# Altium PCB reflex_beta.PcbDoc (part 1 of 2)
Units mil, origin at the board's own origin, x right, y up, seen from the top; angles counter-clockwise.
Board outline 1299.21 x 1771.65 mil, 6 copper layers (Top Layer, Power Plane, Routing_1, Routing_2, Ground Plane, Bottom Layer), stack 48.468 mil thick; 106 components, 94 nets, 473 pads, 173 vias.
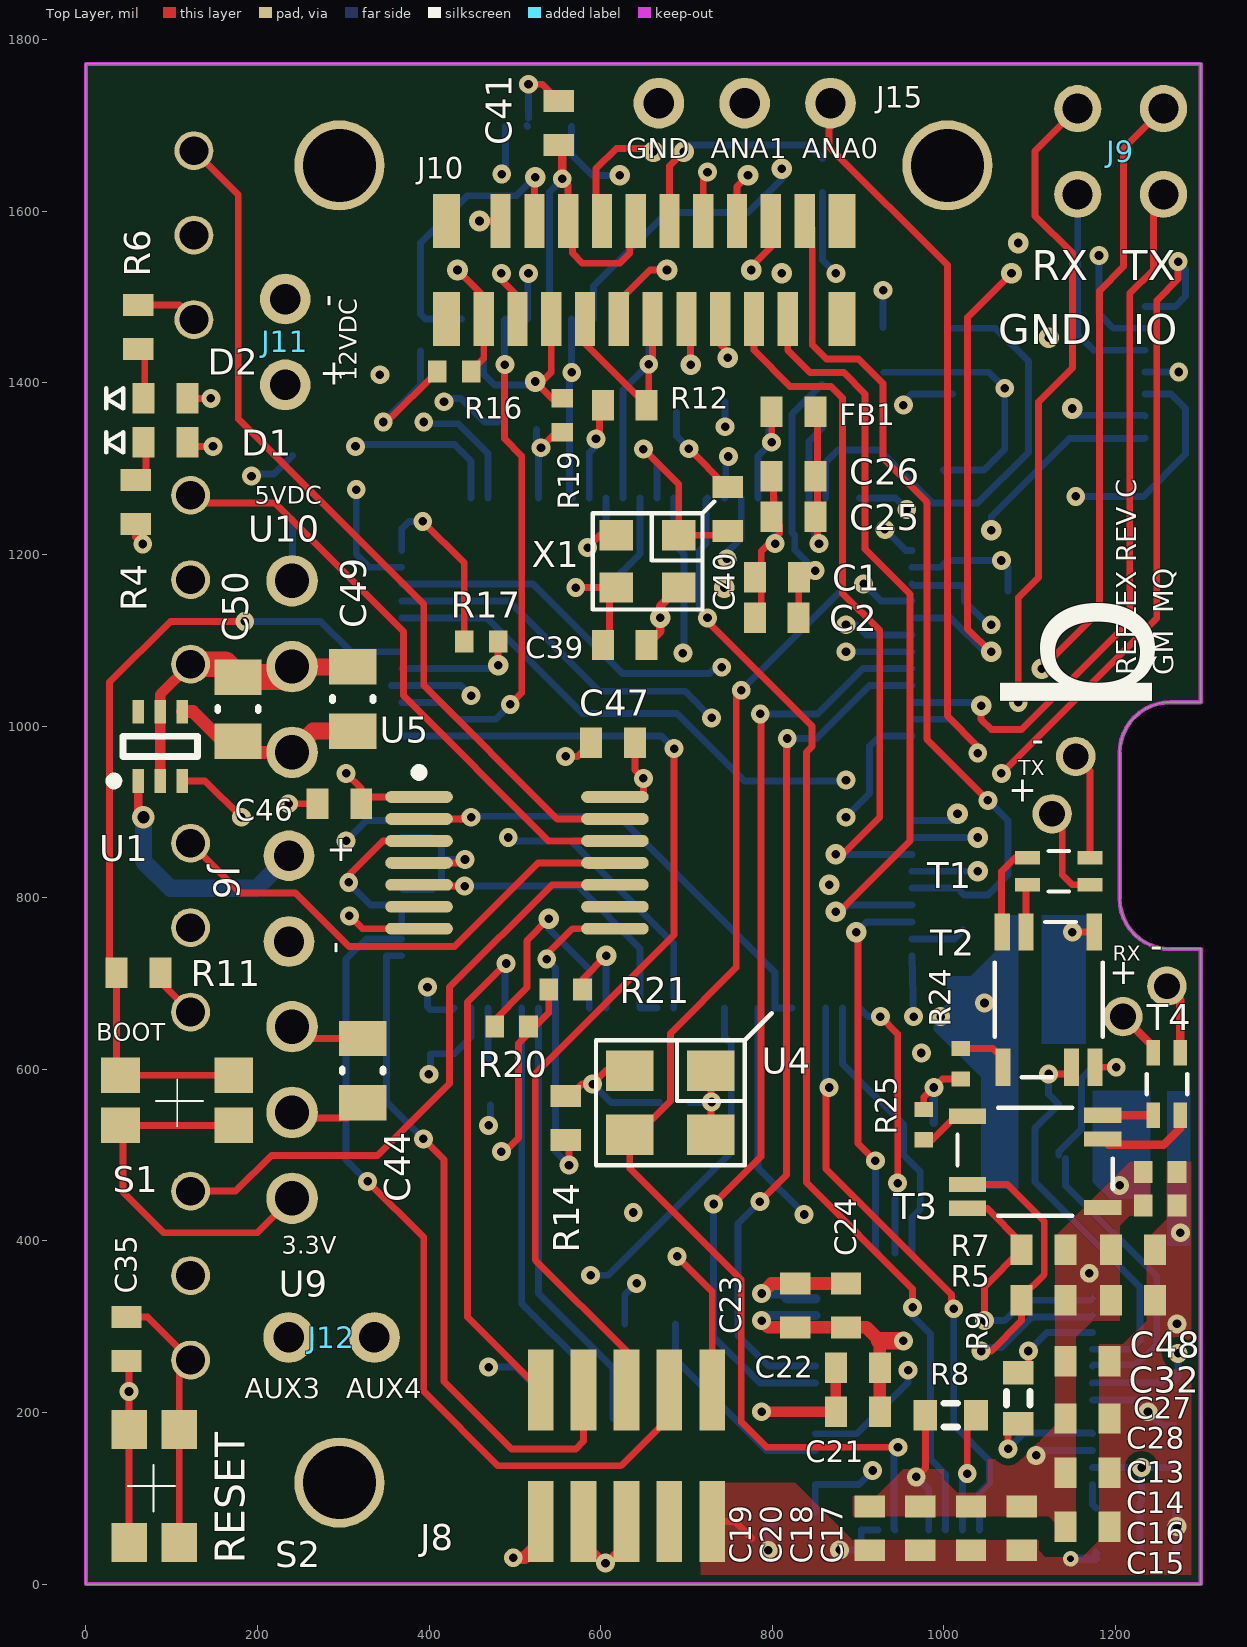
[diagram p0: Top Layer view]
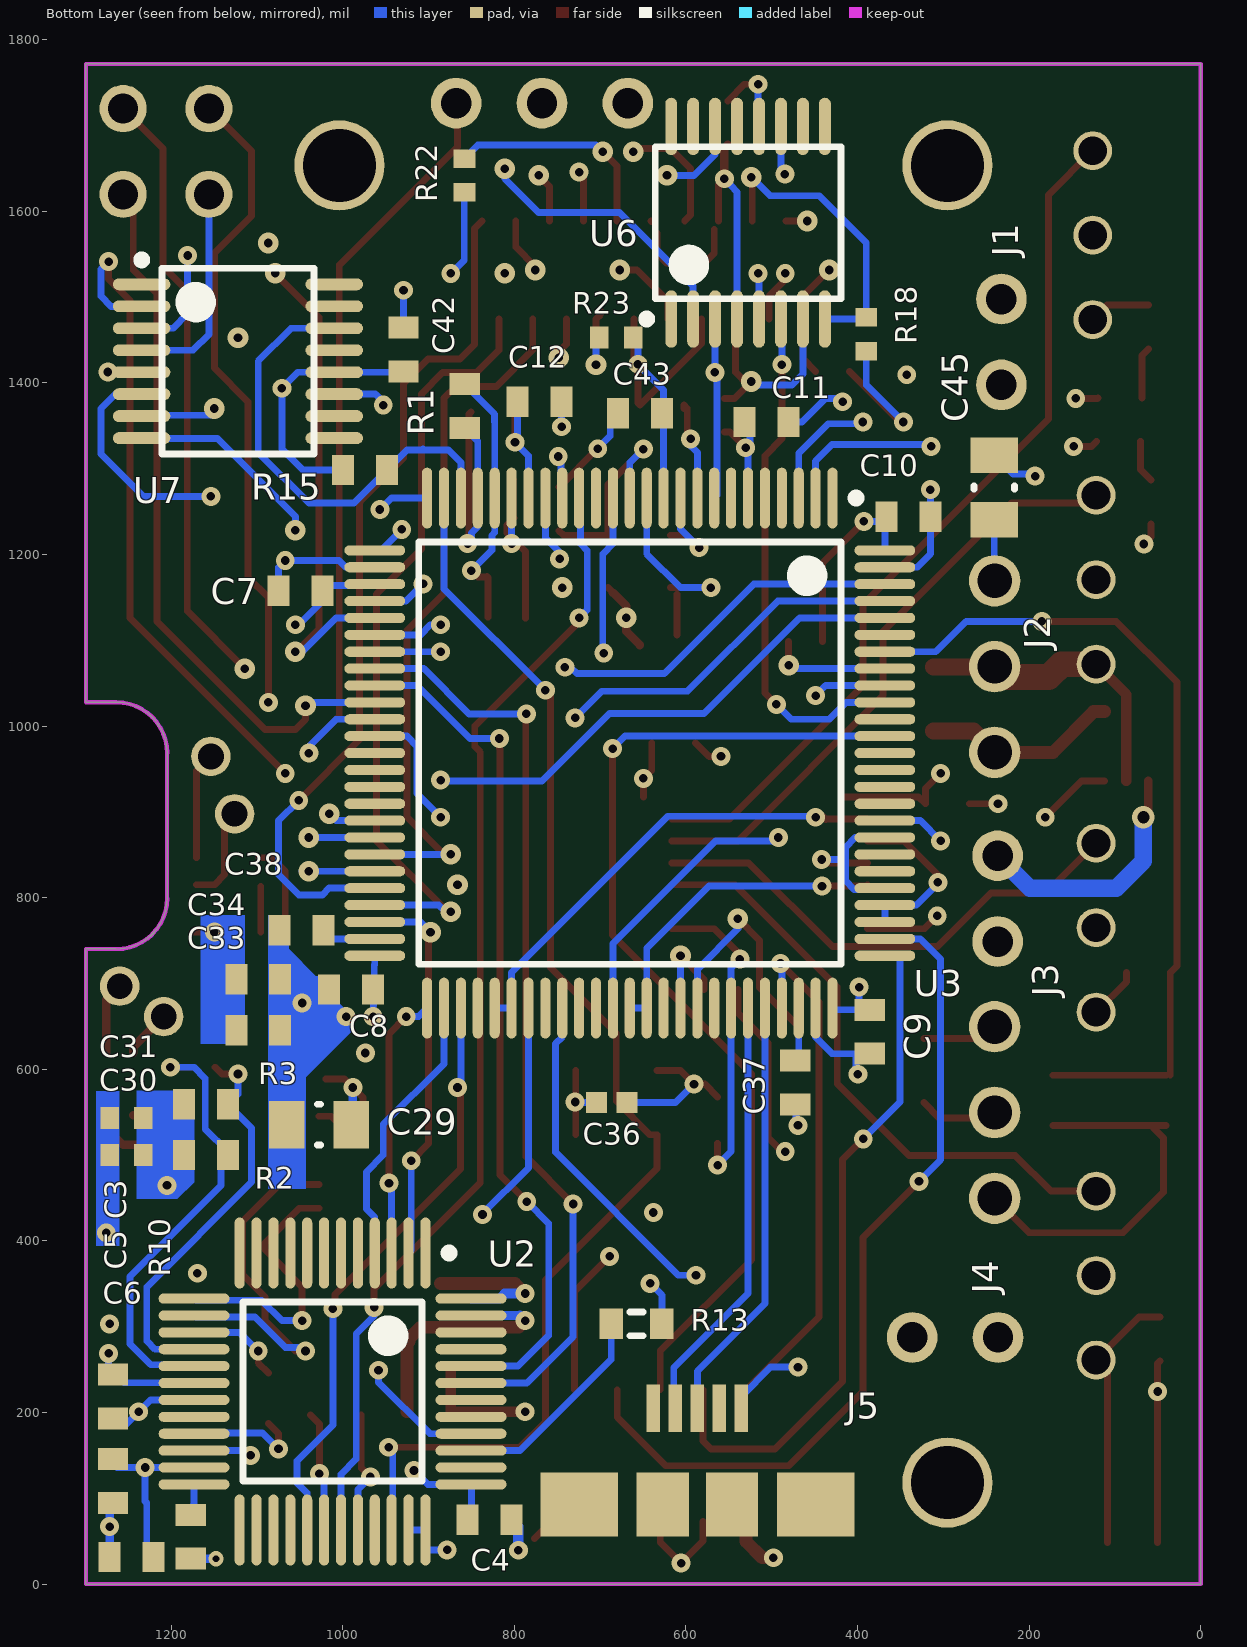
[diagram p1: Bottom Layer view, seen from below]
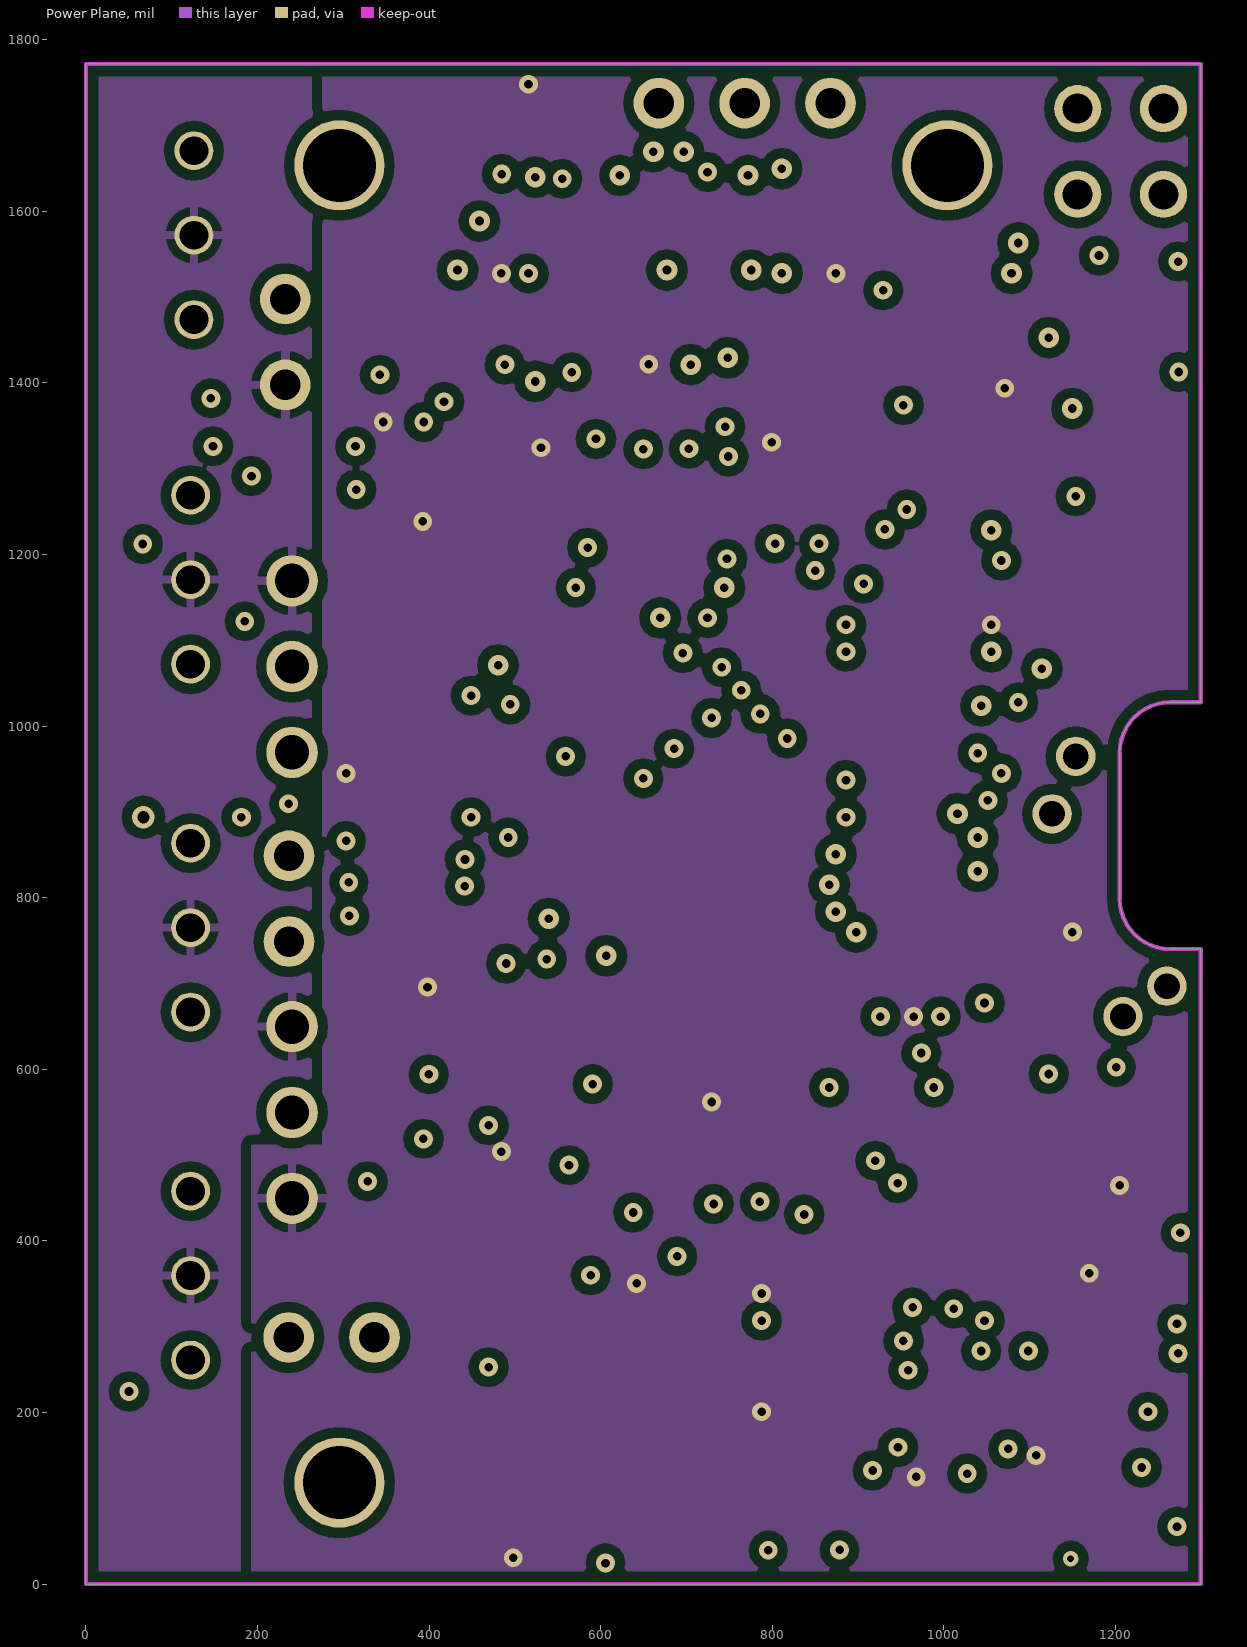
[diagram p2: Power Plane]
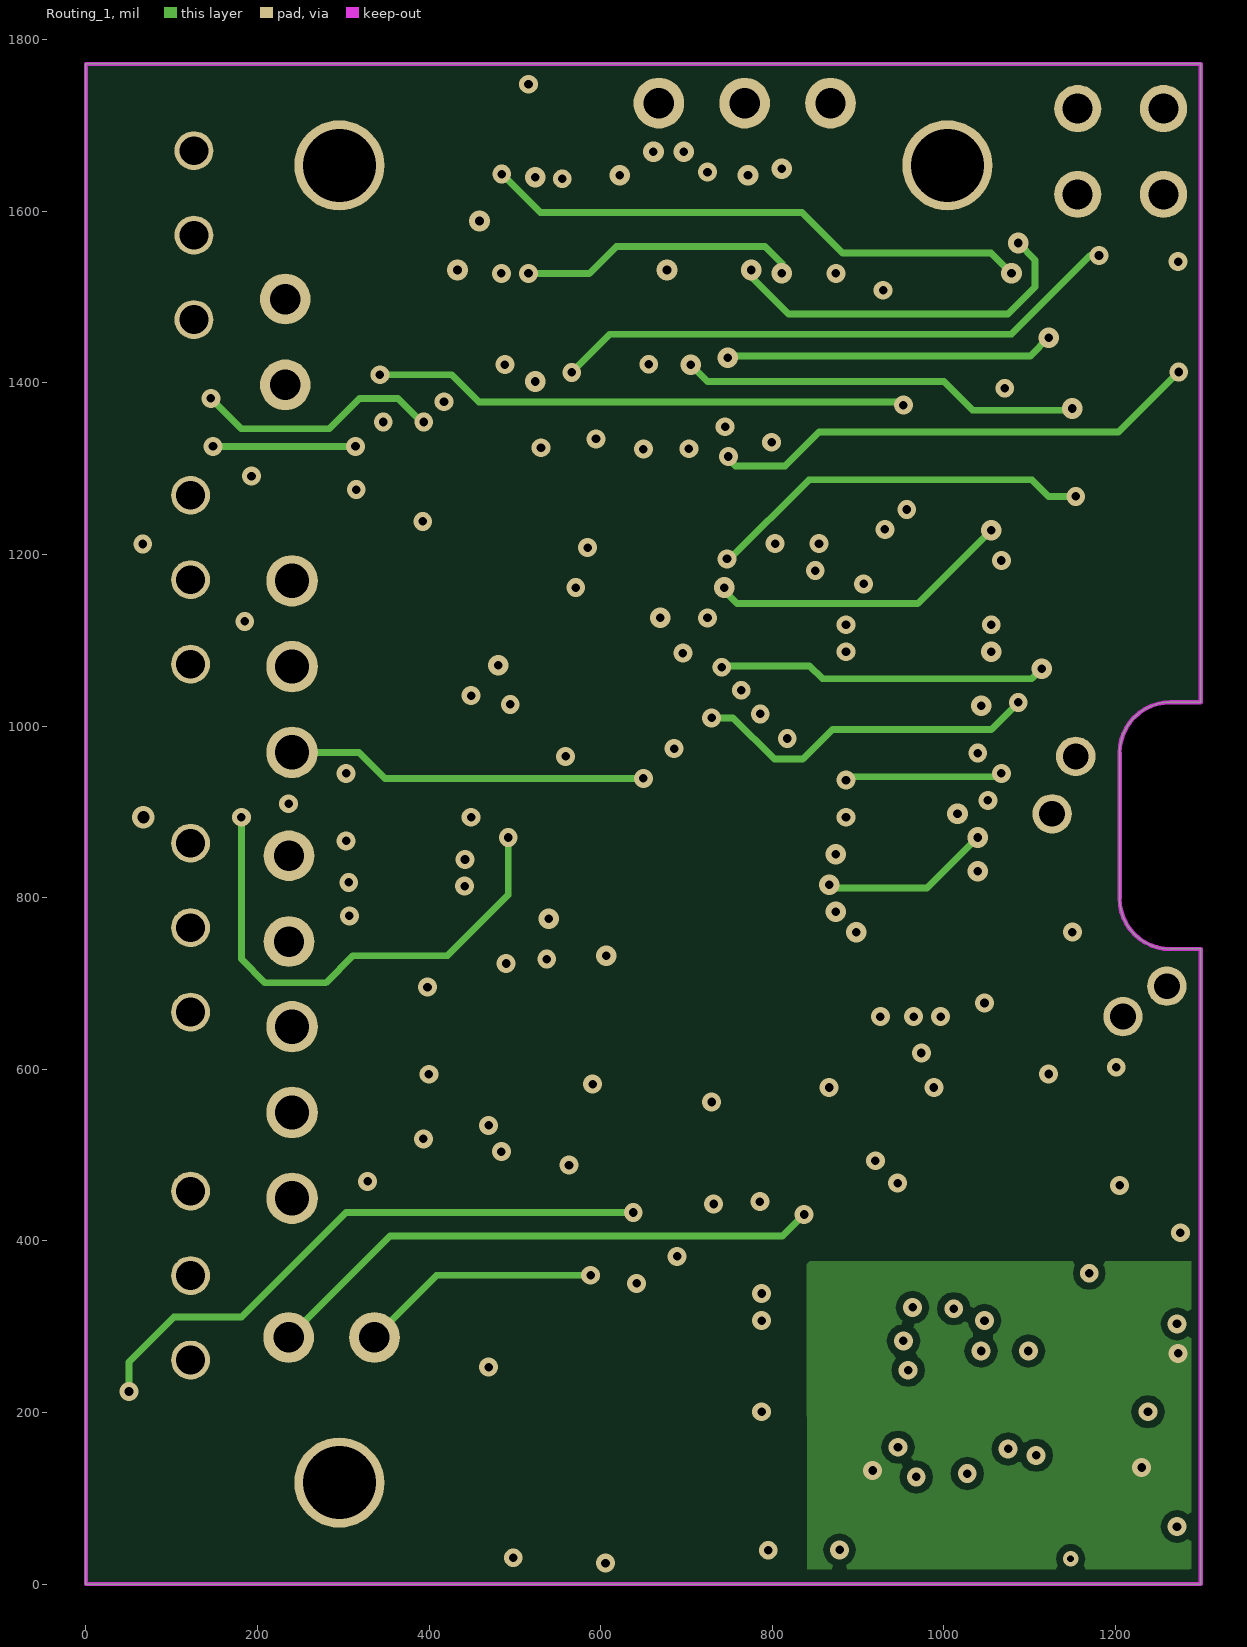
[diagram p3: Routing_1]
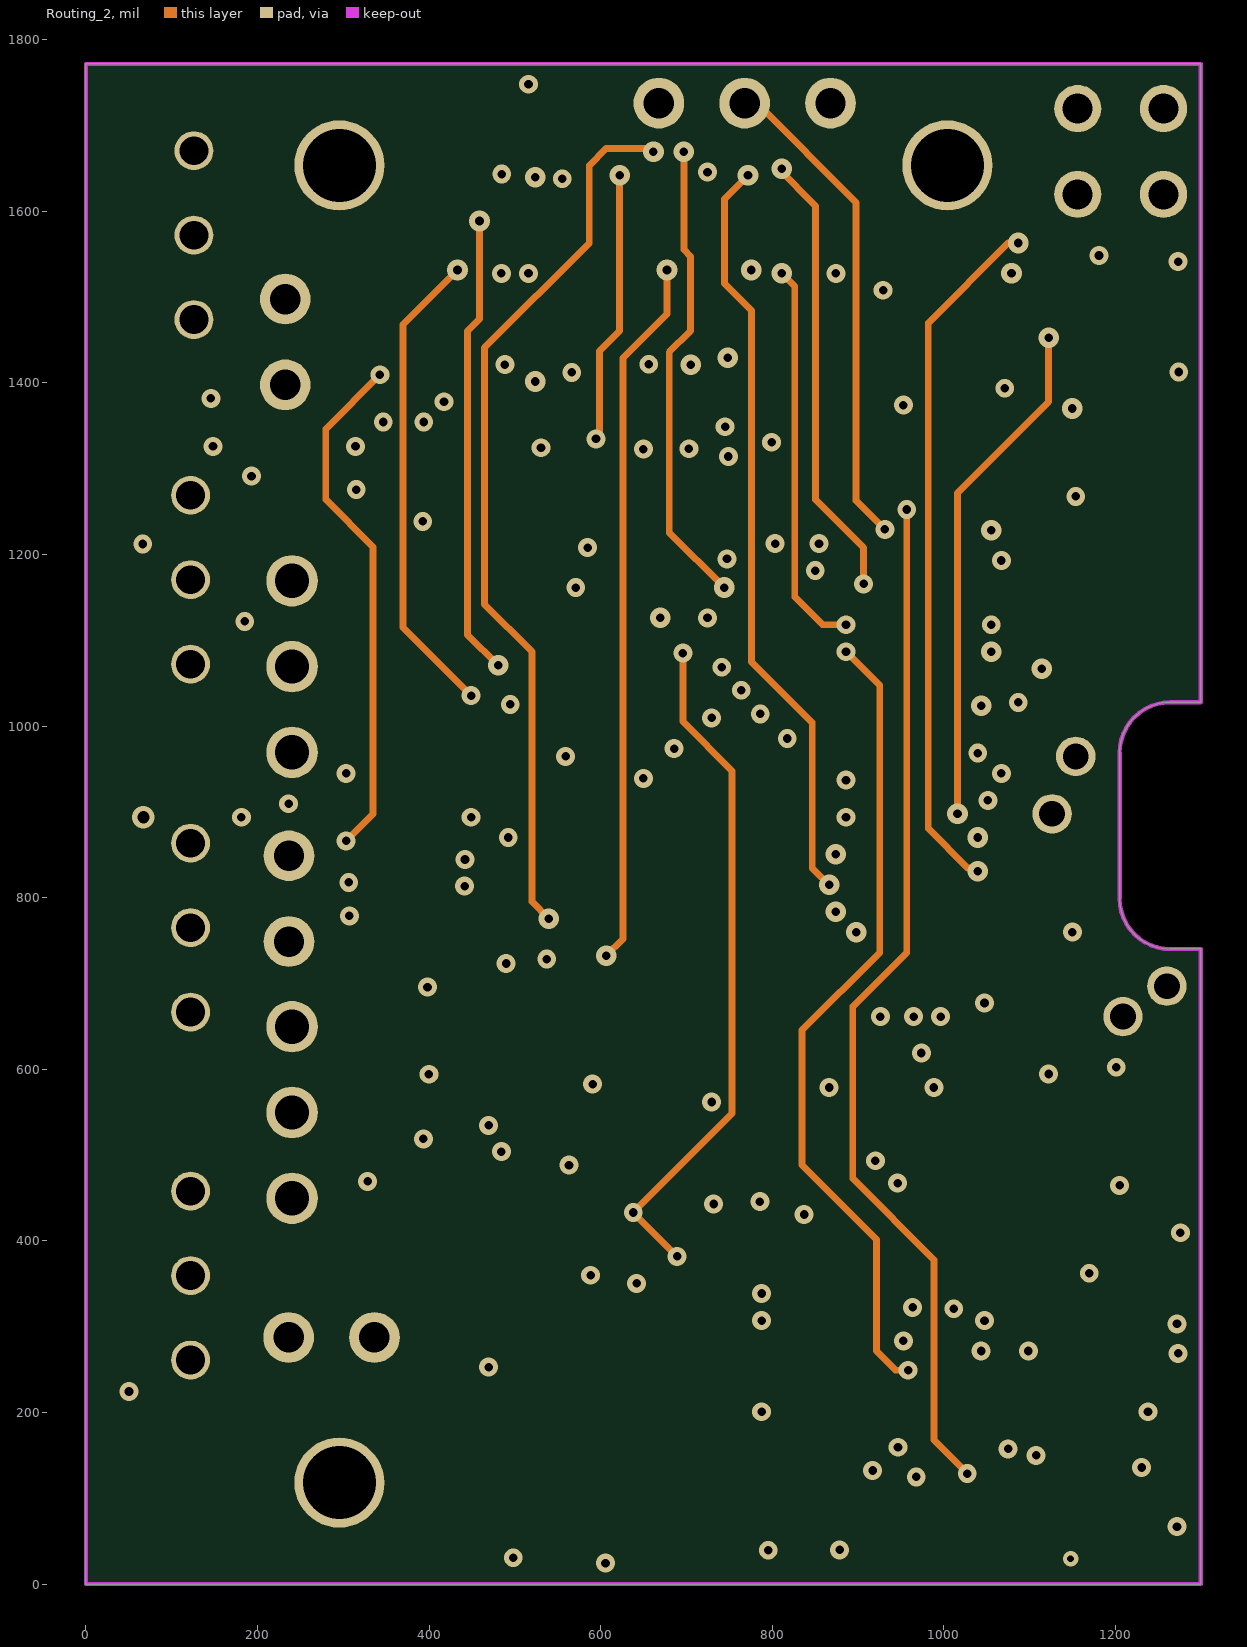
[diagram p4: Routing_2]
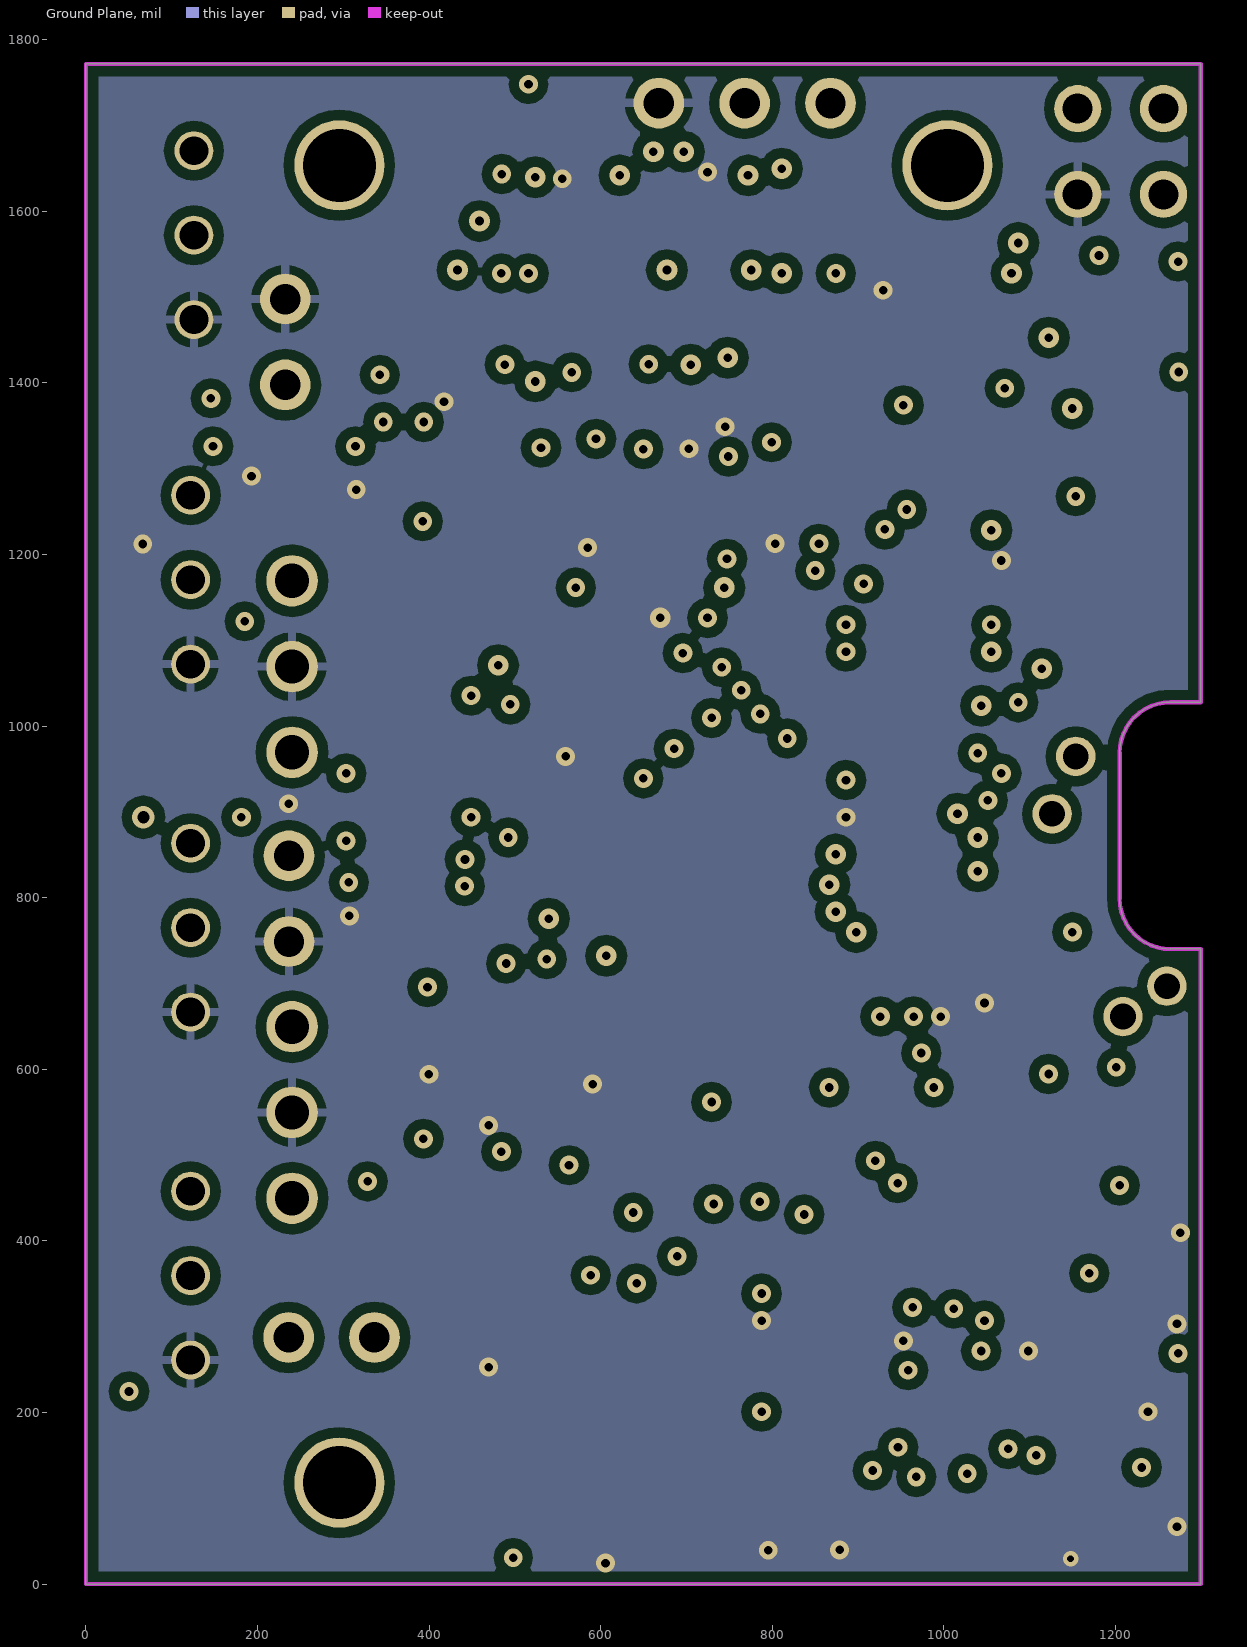
[diagram p5: Ground Plane]

## Layer stack, top to bottom
Top Solder: solder mask 0.4, Solder Resist, Dk 3.5
Top Layer: signal copper 1.4
Dielectric 1: core 10, FR-4, Dk 4.2
Power Plane: signal copper 1.417
Dielectric 3: prepreg 5, Dk 4.2
Routing_1: signal copper 1.417
Dielectric 4: core 10, Dk 4.2
Routing_2: signal copper 1.417
Dielectric 5: prepreg 5, Dk 4.2
Ground Plane: signal copper 1.417
Dielectric 2: core 10, Dk 4.2
Bottom Layer: signal copper 1.4
Bottom Solder: solder mask 0.4, Solder Resist, Dk 3.5

## Board outline
0,0 0,1771.65 1299.21,1771.65 1299.21,1027.56 1263.78,1027.56 1263.78,1027.69 ccw(c1263.78,968.5) 1204.59,968.5 1204.72,968.5 1204.72,799.05 1204.59,799.21 ccw(c1263.78,799.21) 1263.78,740.03 1263.62,740.16 1299.21,740.16 1299.21,0

## Design rules (kind name [scope] priority, off if disabled: settings)
Clearance Clearance_2 [InNamedPolygon('VBAT')] p1: gap=12
Clearance Clearance_1 [InNamedPolygon('3V3')] p2: gap=12
Clearance Clearance_gnd [InNamedPolygon('GND')] p3: gap=12
Clearance clearance_vbat_3v3 [InNet('3V3') vs InNet('VBAT')] p4: gap=15
Clearance Clearance_mcu/usb/phy [(HasFootprint('STM-LQFP100_N') OR HasFootprint('TI-PT48_M') OR HasFootprint('JAE_DX4R005HJ5R2000'))] p5: gap=6
Clearance [All] p6: gap=8
HoleSize [All] p1: absolutevalues=TRUE maxlimit=11811.02 minlimit=1 maxpercent=80.000 minpercent=20.000
MinimumSolderMaskSliver [All] p1: minsoldermaskwidth=0
PolygonConnect via_connect [IsVia] p1: connectstyle=Direct reliefconductorwidth=10 reliefentries=4 polygonreliefangle="90 Angle" airgapwidth=10
PolygonConnect PolygonConnect_2 [All vs IsNamedPolygon('3v3_top_enet')] p2: connectstyle=Direct reliefconductorwidth=10 reliefentries=4 polygonreliefangle="90 Angle" airgapwidth=5
PolygonConnect PolygonConnect_1 [All vs IsNamedPolygon('gnd_top_enet')] p3: connectstyle=Direct reliefconductorwidth=15 reliefentries=4 polygonreliefangle="90 Angle" airgapwidth=5
PolygonConnect [All] p4: connectstyle=Relief reliefconductorwidth=10 reliefentries=4 polygonreliefangle="90 Angle" airgapwidth=10
RoutingVias [All] p1: holewidth=10 width=20 viastyle="Through Hole" minholewidth=10 minwidth=20 maxholewidth=28 maxwidth=50
SilkToSolderMaskClearance [IsPad] p1: minsilkscreentomaskgap=0 clearancetoexposedcopper=TRUE
SolderMaskExpansion [All] p1: expansion=4
Width [All] p1: maxlimit=100 minlimit=8 preferedwidth=8 minimp=50.000000 maximp=50.000000 favimp=50.000000
26 further rules are at their usual default settings.

## Components (designator, comment, footprint, x,y, rotation, side; value= is the part's Value field where it differs from the comment)
C1 "Cap" GENERIC_0603#1 779.92,1173.62 r0 top
C2 "Cap" GENERIC_0603#1 779.53,1125.98 r0 top
C3 "Cap" GENERIC_0603#1 1267.72,244.09 r270 bottom
C4 "Cap" GENERIC_0603#1 803.15,74.8 r0 bottom
C5 "Cap" GENERIC_0603#1 1267.72,94.49 r90 bottom
C6 "Cap" GENERIC_0603#1 1271.65,31.5 r180 bottom
C7 "Cap" GENERIC_0603#1 1074.8,1157.48 r180 bottom
C8 "Cap" GENERIC_0603#1 1015.75,692.91 r180 bottom
C9 "Cap" GENERIC_0603#1 385.83,618.11 r90 bottom
C10 "Cap" GENERIC_0603#1 314.96,1244.09 r0 bottom
C11 "Cap" GENERIC_0603#1 480.32,1354.33 r0 bottom
C12 "Cap" GENERIC_0603#1 744.88,1377.95 r0 bottom
C13 "Cap" GENERIC_0603#1 1192.91,259.84 r180 top
C14 "Cap" GENERIC_0603#1 1192.91,192.91 r180 top
C15 "Cap" GENERIC_0603#1 1192.91,66.93 r180 top
C16 "Cap" GENERIC_0603#1 1192.91,129.92 r180 top
C17 "Cap" GENERIC_0603#1 1090.55,39.37 r90 top
C18 "Cap" GENERIC_0603#1 1031.5,39.37 r90 top
C19 "Cap" GENERIC_0603#1 913.39,39.37 r90 top
C20 "Cap" GENERIC_0603#1 972.44,39.37 r90 top
C21 "Cap" GENERIC_0603#1 925.2,200.79 r180 top
C22 "Cap" GENERIC_0603#1 925.2,251.97 r180 top
C23 "Cap" GENERIC_0603#1 826.77,299.21 r90 top
C24 "Cap" GENERIC_0603#1 885.83,299.21 r90 top
C25 "Cap" GENERIC_0603#1 799.21,1244.09 r0 top
C26 "Cap" GENERIC_0603#1 799.21,1291.34 r0 top
C27 "Cap" GENERIC_0603#2 1220.47,389.76 r180 top
C28 "Cap" GENERIC_0603#2 1220.47,330.71 r180 top
C29 "Cap" GENERIC_0805 1027.56,535.43 r180 bottom
C30 "Cap" GENERIC_0402 1251.97,500 r180 bottom
C31 "Cap" GENERIC_0402 1251.97,543.31 r180 bottom
C32 "Cap" GENERIC_0402 1251.97,440.94 r180 top
C33 "Cap" GENERIC_0603#2 1098.43,645.67 r0 bottom
C34 "Cap" GENERIC_0603#2 1098.43,704.72 r0 bottom
C35 "Cap" GENERIC_0603#1 47.24,311.02 r270 top
C36 "CAP 10nF 16V 0402(1005)" CAPC0402(1005)60_N 686.22,561.02 r0 bottom
C37 "Cap" GENERIC_0603#1 472.44,559.06 r90 bottom
C38 "Cap" GENERIC_0603#1 1073.62,762.2 r180 bottom
C39 "Cap" GENERIC_0603#1 602.36,1094.49 r0 top
C40 "Cap" GENERIC_0603#1 748.03,1227.56 r90 top
C41 "Cap" GENERIC_0603#1 551.18,1677.17 r90 top
C42 "Cap" GENERIC_0603#1 929.13,1464.57 r270 bottom
C43 "Cap" GENERIC_0603#2 653.54,1364.57 r180 bottom
C44 "Cap Pol1" GENERIC_0805 322.44,598.43 r270 top
C45 "Cap Pol1" GENERIC_0805 240.55,1277.95 r90 bottom
C46 "Cap" GENERIC_0603#2 295.28,909.45 r180 top
C47 "Cap" GENERIC_0603#2 614.17,980.32 r0 top
C48 "Cap" GENERIC_0402 1251.97,480.32 r180 top
C49 "Cap Pol1" GENERIC_0805 311.02,1031.5 r90 top
C50 "Cap Pol1" GENERIC_0805 177.17,1019.68 r90 top
D1 "LED0" GENERIC_0603#1 118.11,1330.71 r180 top
D2 "LED1" GENERIC_0603#1 118.11,1381.89 r180 top
FB1 "Ferrite" GENERIC_0603#1 799.21,1366.14 r0 top
J1 "Dynamixel" molex_3pos_header 125.87,1572.13 r90 bottom
J2 "Dynamixel" molex_3pos_header 121.93,1170.55 r90 bottom
J3 "Dynamixel" molex_3pos_header 121.93,765.04 r90 bottom
J4 "Dynamixel" molex_3pos_header 121.93,359.53 r90 bottom
J5 "USB" FCI-10104110 586.61,204.72 r180 bottom
J6 "FAN_OUT" HDR1X2 236.61,848.82 r270 top
J8 "JTAG" CNCTECH_3220-10-0300-00 629.92,149.61 r90 top
J9 "AUX UART" HDR2X2 1255.91,1619.68 r90 top
J10 "Header 20" 20pos_halfmm_vert 463.58,1474.41 r0 top
J11 "POWER" HDR1X2 232.28,1397.64 r90 top
J12 "YET_MORE_AUX" HDR1X2 236.22,287.4 r0 top
J15 "Aux analog in" HDR1X3 867.72,1725.98 r180 top
R1 "Res1" GENERIC_0603#1 857.87,1398.43 r270 bottom
R2 "Res1" GENERIC_0603#1 1185.04,500 r180 bottom
R3 "Res1" GENERIC_0603#1 1133.86,559.06 r0 bottom
R4 "Res1" GENERIC_0603#1 57.87,1235.43 r90 top
R5 "Res1" GENERIC_0603#1 1141.73,330.71 r180 top
R6 "Res1" GENERIC_0603#1 61.02,1490.55 r270 top
R7 "Res1" GENERIC_0603#1 1090.55,389.76 r0 top
R8 "" J1-0603 1007.87,196.85 r0 top
R9 "" J1-0603 1086.61,216.54 r270 top
R10 "1%" GENERIC_0603#2 1177.17,55.12 r90 bottom
R11 "Res1" GENERIC_0603#1 86.61,712.6 r180 top
R12 "Res1" GENERIC_0603#1 602.36,1374.02 r0 top
R13 "" J1-0603 657.48,303.15 r180 bottom
R14 "" GENERIC_0603#2 559.06,543.31 r270 top
R15 "Res1" GENERIC_0603#1 948.34,1298.43 r0 bottom
R16 "Res1" GENERIC_0402 429.13,1413.39 r180 top
R17 "Res1" GENERIC_0402 460.63,1098.43 r180 top
R18 "Res1" GENERIC_0402 389.76,1456.69 r270 bottom
R19 "Res1" GENERIC_0402 555.12,1362.2 r270 top
R20 "Res1" GENERIC_0402 496.06,649.61 r0 top
R21 "Res1" GENERIC_0402 559.06,692.91 r180 top
R22 "Res1" GENERIC_0402 858.27,1641.73 r270 bottom
R23 "Res1" GENERIC_0402 681.1,1452.76 r180 bottom
R24 "75R 5% 0402(1005)" RESC0402(1005)_L 1019.68,606.3 r270 top
R25 "75R 5% 0402(1005)" RESC0402(1005)_L 976.38,535.43 r90 top
S1 "Component_1" EVPAA402_switch 106.3,562.99 r180 top
S2 "Component_1" EVPAA402_switch 78.74,114.17 r90 top
T1 "ACM2012" ACM2012 1133.86,830.71 r270 top
T2 "ALT4532-201-T001" ALT4532-201-T001 1122.05,681.1 r0 top
T3 "ALT4532-201-T001" ALT4532-201-T001 1106.3,492.13 r270 top
T4 "ACM2012" ACM2012 1259.84,582.68 r0 top
U1 "mic94062-63" "mic94062-63 sc-70-6" 86.61,976.38 r90 top
U2 "TLK110PT" TI-PT48_M 1011.81,224.41 r270 bottom
U3 "STM32F427VIT6" STM-LQFP100_N 665.35,968.5 r270 bottom
U4 "oscillator_3.2x2.5" OSCILLATOR_3.2x2.5 728.35,598.43 r180 top
U5 "TXS0104E" TXS0104EPWR 502.36,840.55 r0 top
U6 "SC18IS600" SOP127P600-8N 527.56,1586.61 r90 bottom
U7 "SC18IS600" SOP127P600-8N 1122.05,1425.2 r180 bottom
U9 "R-78B3.3-1.0L" R-78HBXX-0.5_HORIZ 240.16,649.61 r270 top
U10 "R-78B5.0-1.0L" R-78HBXX-0.5_HORIZ 240.16,1169.29 r270 top
X1 "CRYSTAL" CRYSTAL_2_2.5 704.72,1232.28 r180 top

## Footprints (in the part's own frame and the unit in brackets; to place one, negate y for a bottom-side part, rotate by r counter-clockwise, add the part's x,y. Pads: shape width x height; smd on the part's side, far side on the other; paste and mask are expansions set on the pad)
20pos_halfmm_vert [mm]
  rect 0.6x1.6 smd: 1(0,0) 2(0.5,2.9) 3(1,0) 4(1.5,2.9) 5(2,0) 6(2.5,2.9) 7(3,0) 8(3.5,2.9) 9(4,0) 10(4.5,2.9) 11(5,0) 12(5.5,2.9) 13(6,0) 14(6.5,2.9) 15(7,0) 16(7.5,2.9) 17(8,0) 18(8.5,2.9) 19(9,0) 20(9.5,2.9)
  rect 0.8x1.6 smd: ""(-1.1,0) ""(-1.1,2.9) ""(10.6,0) ""(10.6,2.9)
  body extent -3.15,-0.2 12.55,3.3, height 5.3
ACM2012 [mm]
  rect 0.4x0.75 smd: 1(-0.4,-0.925) 2(0.4,-0.925) 3(0.4,0.925) 4(-0.4,0.925)
  silkscreen extent -0.6,-0.3 0.6,0.3, body extent -0.6,-1 0.6,1, height 1.3
ALT4532-201-T001 [mm]
  rect 0.45x1.1 smd: 1(1.375,-2) 2(0.675,-2) 3(-1.35,-2) 4(-1.375,2) 5(-0.675,2) 6(1.35,2)
  silkscreen extent -1.6,-2.3 1.6,2.3, body extent -1.6,-2.25 1.6,2.25, height 2.9
CAPC0402(1005)60_N [mm] "Chip Capacitor, Body 1.0x0.5mm, Height 0.6mm, IPC Medium Density"
  rect 0.62x0.62 smd: 1(-0.45,0) 2(0.45,0)
  body extent -0.55,-0.3 0.55,0.3, height 0.6
CNCTECH_3220-10-0300-00 [mm]
  rect 2.4x0.76 smd: 1(-1.95,2.54) 2(1.95,2.54) 3(-1.95,1.27) 4(1.95,1.27) 5(-1.95,0) 6(1.95,0) 7(-1.95,-1.27) 8(1.95,-1.27) 9(-1.95,-2.54) 10(1.95,-2.54)
  body extent -2.55,-5.6 2.55,5.6, height 5.4
CRYSTAL_2_2.5 [mm]
  rect 1x0.9 smd: 1(0.35,0.25) 2(2.2,0.25) 3(2.2,1.8) 4(0.35,1.8)
  silkscreen extent -0.7,-0.75 2.9,2.45, body extent 0.05,0.05 2.5,2, height 0.55
EVPAA402_switch [mm] "Reset Switch"
  rect 1.15x1.05 smd: 1(-1.675,0.725) 1(1.675,0.725) 2(-1.675,-0.763) 2(1.675,-0.763)
  silkscreen extent -0.76,-0.64 0.64,0.76, body extent -2.15,-1.56 2.15,1.55, height 1.65
FCI-10104110 [mm] "Micro USB B 2.0"
  rect 0.4x1.4 smd: 1(-1.3,0) 2(-0.65,0) 3(0,0) 4(0.65,0) 5(1.3,0)
  rect 2.3x1.9 smd: TAB(-3.5,-2.85) TAB(3.5,-2.85)
  rect 1.55x1.9 smd: TAB(-1.025,-2.85) TAB(1.025,-2.85)
GENERIC_0402 [mm] "Chip Resistor, Body 1.0x0.5mm, IPC Medium Density"
  rect 0.55x0.65 smd: 1(-0.5,0) 2(0.5,0)
  body extent -0.52,-0.27 0.53,0.28, height 0.4
GENERIC_0603#1 [mm]
  rect 0.65x0.9 smd: 1(0,0) 2(1.3,0)
  body extent -0.15,-0.4 1.45,0.4, height 0.35
GENERIC_0603#2 [mm]
  rect 0.65x0.9 smd: 1(-0.65,0) 2(0.65,0)
  body extent -0.8,-0.4 0.8,0.4, height 0.35
GENERIC_0805 [mm] "generic 0805"
  rect 1.05x1.4 smd: 1(-0.95,0) 2(0.95,0)
  silkscreen extent -0.05,-0.6 0.05,0.6, body extent -1.1,-0.67 1.1,0.68, height 0.7
HDR1X2 [mm] "Connector; Header; 2 Position"
  round 1.5 hole 0.9: 1(0,0) 2(2.54,0)
HDR1X3 [mm] "Connector; Header; 3 Position"
  round 1.5 hole 0.9: 1(0,0) 2(2.54,0) 3(5.08,0)
HDR2X2 [mil] "Connector; Header; 2x2 Position"
  round 55 hole 35: 1(0,0) 2(0,100) 3(100,0) 4(100,100)
J1-0603 [mm] "Chip Resistor, Body 1.6x0.8mm, IPC High Density"
  rect 0.7x0.9 smd: 1(-0.75,0) 2(0.75,0)
  silkscreen extent -0.2,-0.35 0.2,0.35, body extent -0.85,-0.48 0.85,0.48, height 0.9
"mic94062-63 sc-70-6" [mm] "SOT23, 6-Leads, Body 2.00x2.10mm, Pitch 0.65mm, IPC Medium Density"
  rect 0.7x0.35 smd: 1(-1.025,0.65) 2(-1.025,0) 3(-1.025,-0.65) 4(1.025,-0.65) 5(1.025,0) 6(1.025,0.65)
  silkscreen extent -1.15,-1.1 0.3,1.5, body extent -0.67,-1.1 0.67,1.1, height 1.1
molex_3pos_header [mm]
  round 1.15 hole 0.85: 1(-2.5,0) 2(0,0) 3(2.5,0)
  body extent -4.95,-3.09 4.95,1.81, height 5.95
OSCILLATOR_3.2x2.5 [mm]
  rect 1.4x1.2 smd: 1(0,0) 2(2.4,0) 3(2.4,1.9) 4(0,1.9)
  silkscreen extent -1.8,-1.7 3.4,2.8, body extent -0.4,-0.3 2.8,2.2, height 1.05
R-78HBXX-0.5_HORIZ [mil]
  round 60 hole 40: 1(0,0) 2(100,0) 3(200,0)
  body extent -128,-14 325,748, height 413
RESC0402(1005)_L [mm] "Chip Resistor, Body 1.0x0.5mm, IPC High Density"
  rect 0.45x0.55 smd: 1(-0.45,0) 2(0.45,0)
  body extent -0.52,-0.27 0.53,0.28, height 0.4
SOP127P600-8N [mm]
  oval 1.7x0.35 smd: 1(-2.85,2.275) 2(-2.85,1.625) 3(-2.85,0.975) 4(-2.85,0.325) 5(-2.85,-0.325) 6(-2.85,-0.975) 7(-2.85,-1.625) 8(-2.85,-2.275) 9(2.85,-2.275) 10(2.85,-1.625) 11(2.85,-0.975) 12(2.85,-0.325) 13(2.85,0.325) 14(2.85,0.975) 15(2.85,1.625) 16(2.85,2.275)
  silkscreen extent -2.97,-2.75 2.25,3.13, body extent -2.25,-2.55 2.25,2.55, height 1.1
STM-LQFP100_N [mm] "Thin QFP, 100-Leads, Body 14x14mm, Pitch 0.5mm, IPC Medium Density"
  oval 1.8x0.3 smd: 1(-7.55,6) 2(-7.55,5.5) 3(-7.55,5) 4(-7.55,4.5) 5(-7.55,4) 6(-7.55,3.5) 7(-7.55,3) 8(-7.55,2.5) 9(-7.55,2) 10(-7.55,1.5) 11(-7.55,1) 12(-7.55,0.5) 13(-7.55,0) 14(-7.55,-0.5) 15(-7.55,-1) 16(-7.55,-1.5) 17(-7.55,-2) 18(-7.55,-2.5) 19(-7.55,-3) 20(-7.55,-3.5) 21(-7.55,-4) 22(-7.55,-4.5) 23(-7.55,-5) 24(-7.55,-5.5) 25(-7.55,-6) 51(7.55,-6) 52(7.55,-5.5) 53(7.55,-5) 54(7.55,-4.5) 55(7.55,-4) 56(7.55,-3.5) 57(7.55,-3) 58(7.55,-2.5) 59(7.55,-2) 60(7.55,-1.5) 61(7.55,-1) 62(7.55,-0.5) 63(7.55,0) 64(7.55,0.5) 65(7.55,1) 66(7.55,1.5) 67(7.55,2) 68(7.55,2.5) 69(7.55,3) 70(7.55,3.5) 71(7.55,4) 72(7.55,4.5) 73(7.55,5) 74(7.55,5.5) 75(7.55,6)
  oval 0.3x1.8 smd: 26(-6,-7.55) 27(-5.5,-7.55) 28(-5,-7.55) 29(-4.5,-7.55) 30(-4,-7.55) 31(-3.5,-7.55) 32(-3,-7.55) 33(-2.5,-7.55) 34(-2,-7.55) 35(-1.5,-7.55) 36(-1,-7.55) 37(-0.5,-7.55) 38(0,-7.55) 39(0.5,-7.55) 40(1,-7.55) 41(1.5,-7.55) 42(2,-7.55) 43(2.5,-7.55) 44(3,-7.55) 45(3.5,-7.55) 46(4,-7.55) 47(4.5,-7.55) 48(5,-7.55) 49(5.5,-7.55) 50(6,-7.55) 76(6,7.55) 77(5.5,7.55) 78(5,7.55) 79(4.5,7.55) 80(4,7.55) 81(3.5,7.55) 82(3,7.55) 83(2.5,7.55) 84(2,7.55) 85(1.5,7.55) 86(1,7.55) 87(0.5,7.55) 88(0,7.55) 89(-0.5,7.55) 90(-1,7.55) 91(-1.5,7.55) 92(-2,7.55) 93(-2.5,7.55) 94(-3,7.55) 95(-3.5,7.55) 96(-4,7.55) 97(-4.5,7.55) 98(-5,7.55) 99(-5.5,7.55) 100(-6,7.55)
  silkscreen extent -7.67,-6.25 6.25,6.82, body extent -7,-7 7,7, height 1.6
TI-PT48_M [mm] "Thin QFP, 48-Leads, Body 7x7mm, Pitch 0.5mm, IPC Low Density"
  oval 2.1x0.3 smd: 1(-4.1,2.75) 2(-4.1,2.25) 3(-4.1,1.75) 4(-4.1,1.25) 5(-4.1,0.75) 6(-4.1,0.25) 7(-4.1,-0.25) 8(-4.1,-0.75) 9(-4.1,-1.25) 10(-4.1,-1.75) 11(-4.1,-2.25) 12(-4.1,-2.75) 25(4.1,-2.75) 26(4.1,-2.25) 27(4.1,-1.75) 28(4.1,-1.25) 29(4.1,-0.75) 30(4.1,-0.25) 31(4.1,0.25) 32(4.1,0.75) 33(4.1,1.25) 34(4.1,1.75) 35(4.1,2.25) 36(4.1,2.75)
  oval 0.3x2.1 smd: 13(-2.75,-4.1) 14(-2.25,-4.1) 15(-1.75,-4.1) 16(-1.25,-4.1) 17(-0.75,-4.1) 18(-0.25,-4.1) 19(0.25,-4.1) 20(0.75,-4.1) 21(1.25,-4.1) 22(1.75,-4.1) 23(2.25,-4.1) 24(2.75,-4.1) 37(2.75,4.1) 38(2.25,4.1) 39(1.75,4.1) 40(1.25,4.1) 41(0.75,4.1) 42(0.25,4.1) 43(-0.25,4.1) 44(-0.75,4.1) 45(-1.25,4.1) 46(-1.75,4.1) 47(-2.25,4.1) 48(-2.75,4.1)
  silkscreen extent -4.22,-2.65 2.65,3.57, body extent -3.5,-3.5 3.5,3.5, height 1.6
TXS0104EPWR [mm]
  oval 2x0.35 smd: 1(-2.9,1.95) 2(-2.9,1.3) 3(-2.9,0.65) 4(-2.9,0) 5(-2.9,-0.65) 6(-2.9,-1.3) 7(-2.9,-1.95) 8(2.9,-1.95) 9(2.9,-1.3) 10(2.9,-0.65) 11(2.9,0) 12(2.9,0.65) 13(2.9,1.3) 14(2.9,1.95)
  silkscreen extent -3.02,2.55 -2.77,2.8, body extent -2.25,-2.55 2.25,2.55, height 1.2

## Part data
C1 C2 C3 C4 C5 C6 C7 C8 C9 C10 C11 C12 C13 C14 C15 C16 C17 C18 C19 C20 C21 C22 C23 C24 C25 C26 C27 C28 C29 C30 C31 C32 C33 C34 C35 C37 C38 C39 C40 C41 C42 C43 C46 C47 C48: "Capacitor"
C36: library part CMP-1034-01874-1, "CAP 10nF 16V ±5% 0402 (1005 Metric) Thickness 0.6mm SMD"
C44 C45 C49 C50: "Polarized Capacitor (Radial)"
D1: "Typical INFRARED GaAs LED"
D2: library part LED0, "Typical INFRARED GaAs LED"
FB1: library part Res2, "Resistor"
J1 J2 J3 J4: library part MX-12_3pin_header
J5: library part "Header 5", "Header, 5-Pin"
J6 J11 J12: library part "Header 2", "Header, 2-Pin"
J8: library part "Header 5X2", "Header, 5-Pin, Dual row"
J9: library part "Header 2X2", "Header, 2-Pin, Dual row"
J10: "Header, 20-Pin"
J15 U9 U10: library part "Header 3", "Header, 3-Pin"
R1 R2 R3 R4 R5 R6 R7 R11 R12 R15 R16 R17 R18 R19 R20 R21 R22 R23: "Resistor"
R8 R9 R10 R13 R14: library part Res3, "Resistor"
R24 R25: library part CMP-1011-00047-1, "75R 0.063W 5% 0402 (1005 Metric)  SMD"
U2: library part CMP-0302-00001-1, "Industrial Temp, Single Port 10/100 Mb/s Ethernet Physical Layer Transceiver, -40 to 85 degC, 48-Pin LQFP (PT), Green (RoHS & no Sb/Br)"
U3: library part CMP-0243-00027-2, "ARM Cortex-M4 32-bit MCU+FPU, 210 DMIPS, 2048 kB Flash, 256 kB Internal RAM, 82 I/Os, 100-pin LQFP, -40 to 85 degC, Tray"
U5 U6 U7: library part Component_1

## Free pads (board coordinates)
  round 46 hole 30: 0(1125.98,897.64) 0(1153.54,964.57) 0(1208.66,661.42) 0(1259.84,696.85)
  round 105 hole 85: Drill(295.28,118.11) Drill(295.28,1653.54) Drill(1003.94,1653.54)

## Via types
v1: diameter 22, hole 10, Top Layer to Bottom Layer, 110 vias
v2: diameter 24, hole 10, Top Layer to Bottom Layer, 18 vias
v3: diameter 22, hole 10, Top Layer to Bottom Layer, tented top, 16 vias
v4: diameter 24, hole 10, Top Layer to Bottom Layer, tented top, 13 vias
v5: diameter 22, hole 10, Top Layer to Bottom Layer, tented both sides, 9 vias
v6: diameter 24, hole 10, Top Layer to Bottom Layer, tented both sides, 3 vias
v7: diameter 22, hole 10, Top Layer to Bottom Layer, tented bottom, 2 vias
v8: diameter 26, hole 14, Top Layer to Bottom Layer, 1 vias
v9: diameter 18, hole 8, Top Layer to Bottom Layer, 1 vias

## Nets (pads, with @x,y where several pads share a name; then routed paths per layer and width w, separated by ;. In a path a pad name is that pad's centre, name@x,y a point inside that pad or via, vN(x,y) a via of type N, cw(c..) or ccw(c..) an arc to the next point about the centre after c; other vN are vias at no path point)
3V3: C7.2 C8.2 C9.2 C10.2 C11.2 C12.2 C13.2 C14.2 C15.2 C16.2 C17.2 C18.2 C19.2 C20.2 C21.2 C22.2 C23.2 C24.2 C27.2 C28.2 C30.2 C31.2 C32.2 C33.2 C34.2 C36.2 C41.2 C42.2 C43.2 C46.1 C48.2 FB1.1 J8.1 J10.3 J10.7 J10.11 R2.1 R3.2 R5.1 R7.2 R8.1 R12.2 R13.2 R15.2 R16.2 R17.2 R18.2 R19.2 R20.2 R21.2 R22.2 R23.2 S1.1 T2.6 T3.6 U2.22 U2.32 U2.48 U3.6 U3.11 U3.19 U3.28 U3.50 U3.75 U3.100 U4.1 U4.4 U5.1 U6.12 U7.12 U9.3 | length 3463.9
  Top Layer w8: S1.1@40.35,534.45 S1.1@172.24,534.45 ; S1.1@55.12,531.5 43.31,519.69 43.31,456.69 90.55,409.45 200,409.45 U9.3@240.16,449.61 ; v1(303.15,944.88) 320.87,927.17 C46.1@320.87,909.45 328.74,917.32 U5.1@388.19,917.32 U5.1@414.96,917.32 ; v1(346.46,1354.33) 350.39,1354.33 R16.2@409.45,1413.39 ; v1(392.52,1238.58) 440.94,1190.16 R17.2@440.94,1098.43 ; v1@484.25,500 503.94,519.69 503.94,629.92 539.37,665.35 R21.2@539.37,692.91 ; v1(484.25,1527.56) 484.25,1519.68 502.95,1500.98 J10.3@502.95,1474.41 ; v1(515.75,1748.03) 531.5,1748.03 C41.2@551.18,1728.35 ; v1(530.32,1324.41) 548.43,1342.52 R19.2@555.12,1342.52 ; J10.7@581.69,1474.41 581.69,1445.87 R12.2@653.54,1374.02 655.91,1376.38 v5(655.91,1421.65) ; v5@660.43,1427.28 J10.11@660.43,1474.41 ; U4.4@728.35,523.62 U4.1@728.35,598.43 ; v1(799.21,1330.71) FB1.1@799.21,1366.14 ; v1(967.72,124.8) 978.35,135.43 R8.1@978.35,196.85 ; v7(1149.61,759.84) T2.6@1175.2,759.84
  Top Layer w12: v1(787.4,200.79) C21.2@874.02,200.79 C22.2@874.02,251.97
  Top Layer w15: v1(498.03,30.71) 511.02,30.71 529.92,49.61 J8.1@529.92,72.83 ; v1(787.4,338.58) 799.21,350.39 C23.2@826.77,350.39 C24.2@885.83,350.39
  Bottom Layer w8: v1(346.46,1354.33) 389.76,1397.64 R18.2@389.76,1437.01 ; U3.100@368.11,1204.72 368.11,1230.32 376.38,1238.58 v1(392.52,1238.58) ; v1(398.03,695.67) 398.03,672.83 401.57,669.29 427.17,669.29 U3.75@429.13,671.26 ; U6.12@513.78,1699.8 U6.12@514.76,1698.82 ; U6.12@515.75,1708.66 v1(515.75,1748.03) v1@515.75,1750.98 ; C11.2@525.2,1345.67 525.2,1329.53 v1(530.32,1324.41) 527.56,1321.65 U3.6@527.56,1265.75 ; U3.11@625.98,1265.75 625.98,1391.73 v5(655.91,1421.65) 655.91,1447.24 R23.2@661.42,1452.76 ; R13.2@627.95,303.15 627.95,336.61 v1(641.73,350.39) ; C36.2@703.94,561.02 728.35,561.02 v1(729.13,561.81) ; U3.19@783.46,1265.75 783.46,1314.96 v1(799.21,1330.71) 796.06,1333.86 C12.2@796.06,1377.95 ; R22.2@858.27,1622.05 858.27,1543.31 v1(874.02,1527.56) ; C42.2@930.12,1412.4 U7.12@1009.84,1412.4 1052.17,1412.4 v3(1070.87,1393.7) 1070.87,1322.83 1046.46,1298.43 R15.2@999.52,1298.43 R15.2@1002.36,1295.59 ; U3.50@962.6,732.28 v5(964.57,661.42) ; U3.28@962.6,1165.35 964.28,1163.67 1021.37,1163.67 1023.62,1161.42 C7.2@1023.62,1157.48 1023.62,1145.67 1051.18,1118.11 v3(1055.12,1118.11) ; v1(967.72,124.8) 982.28,110.24 U2.32@982.28,62.99 ; v1(1107.48,150) 1112.99,155.51 U2.22@1173.23,155.51
  Bottom Layer w11: 811.02,338.58 816.93,332.68 U2.48@850.39,332.68
  Bottom Layer w12: v1(787.4,338.58) 811.02,338.58
  other v1: 1169.29,362.2 1204.72,464.57 484.25,503.94
3V3_ANA: C25.2 C26.2 FB1.2 R1.2 U3.22 | length 313
  Top Layer w8: FB1.2@850.39,1366.14 852.76,1363.78 852.76,1215.75 850.39,1213.39 855.9,1213.38 855.12,1212.6 v1(854.33,1212.6)
  Bottom Layer w8: v1(854.33,1212.6) 855.12,1212.6 855.9,1213.38 850.4,1213.38 849.87,1213.91 849.87,1224.93 842.52,1232.28 U3.22@842.52,1265.75 842.52,1331.89 R1.2@857.87,1347.24
5V: C47.2 C49.1 C50.1 U1.4 U5.14 U10.3 | length 717.8
  Top Layer w8: C47.2@639.76,980.32 639.76,948.82 v1(649.61,938.98) U5.14@649.61,917.32
  Top Layer w15: U1.4@112.2,1016.73 124.8,1016.73 172.24,969.29 U10.3@240.16,969.29
  Top Layer w20: U10.3@240.16,969.29 264.96,994.09 C49.1@311.02,994.09
  Routing_1 w8: U10.3@240.16,969.29 318.11,969.29 348.43,938.98 v1(649.61,938.98)
"AUX GPIO0": J9.1 U3.35 | length 853.5
  Top Layer w8: v4(1043.31,1023.62) 1043.31,1007.87 1055.12,996.06 1090.55,996.06 1216.54,1122.05 1216.54,1503.94 1244.09,1531.5 1244.09,1607.87 J9.1@1249.83,1613.61
  Routing_2 w8: J9.1@1249.83,1613.61 J9.1@1255.91,1619.68
  Bottom Layer w8: U3.35@962.6,1027.56 1039.37,1027.56 v4(1043.31,1023.62) 1047.24,1019.69 v4@1051.18,1023.62
"AUX UART RX": J9.4 U3.97 | length 1578.9
  Top Layer w8: v3(1086.61,1027.56) 1086.61,1149.61 1110.24,1173.23 1110.24,1377.95 1149.61,1417.32 1149.61,1551.18 1106.3,1594.49 1106.3,1670.08 J9.4@1155.91,1719.68
  Routing_1 w8: v1(729.13,1009.45) 754.33,1009.45 802.35,961.43 835.45,961.43 870.08,996.06 1055.12,996.06 v3(1086.61,1027.56)
  Bottom Layer w8: U3.97@368.11,1145.67 492.91,1145.67 598.03,1040.55 698.03,1040.55 v1(729.13,1009.45)
"AUX UART TX": J9.3 U3.98 | length 1529
  Top Layer w8: v4(1114.17,1066.93) 1181.1,1133.86 1181.1,1507.1 1209.43,1535.43 1209.43,1673.21 J9.3@1255.91,1719.68
  Routing_1 w8: v1(740.94,1068.5) 734.25,1068.5 735.83,1070.08 843.31,1070.08 858.27,1055.12 1102.36,1055.12 v4(1114.17,1066.93)
  Bottom Layer w8: U3.98@368.11,1165.35 520.87,1165.35 625.2,1061.02 726.77,1061.02 734.25,1068.5 v1(740.94,1068.5)
AUX_ANA0: J15.1 U3.36 | length 923.9
  Top Layer w8: J15.1@874.02,1719.69 866.14,1711.81 866.14,1675 1003.94,1537.21 1003.94,1011.81 1039.37,976.38 v1(1039.37,968.5)
  Bottom Layer w8: U3.36@962.6,1007.87 1007.87,1007.87 1039.37,976.38 v1(1039.37,968.5)
AUX_ANA1: J15.2 U3.26 | length 634.9
  Top Layer w8: J15.2@767.72,1725.98 773.62,1720.08 J15.2@785.74,1720.08
  Routing_2 w8: J15.2@767.72,1725.98 781.89,1725.98 897.64,1610.24 897.64,1262.6 v3(931.1,1229.13)
  Bottom Layer w8: v3(931.1,1229.13) 955.51,1204.72 U3.26@962.6,1204.72
AUX_GPIO1: J10.19 U3.47 | length 893.3
  Top Layer w8: J10.19@817.91,1474.41 817.91,1437.99 844.05,1411.86 883.42,1411.86 908.1,1387.17 908.1,1206.13 960.63,1153.61 960.63,866.14 879.79,785.3 v2@879.79,783.02
  Bottom Layer w8: v2@879.79,783.02 888.11,791.34 U3.47@962.6,791.34
  other v2: 874.02,783.46
AUX_GPIO2: J10.20 U3.46 | length 1007.2
  Top Layer w8: J10.20@837.6,1588.58 846.46,1579.72 846.46,1444.64 863.24,1427.86 900.58,1427.86 929.13,1399.3 929.13,1312.45 979.69,1261.89 979.69,1260.46 980.32,1259.84 980.32,984.25 v1(1051.18,913.39)
  Bottom Layer w8: U3.46@962.6,811.02 1015.75,811.02 1023.62,803.15 1051.18,803.15 1074.8,826.77 1074.8,889.76 v1(1051.18,913.39)
AUX_GPIO3: J12.1 U3.57 | length 923.2
  Routing_1 w8: J12.1@236.22,287.4 354.33,405.51 811.81,405.51 v1(837.01,430.71)
  Bottom Layer w8: U3.57@783.46,671.26 783.46,485.04 837.4,431.1 v1(837.01,430.71)
AUX_GPIO4: J12.2 U3.59 | length 678.1
  Routing_1 w8: J12.2@336.22,287.4 408.66,359.84 v1(588.19,359.84)
  Bottom Layer w8: v1@587.11,358.76 v1(588.19,359.84) 608.66,359.84 752.13,503.32 752.13,629.76 744.09,637.8 U3.59@744.09,671.26
BOOT0: R11.2 S1.2 U3.94 | length 977
  Top Layer w8: S1.2@35.43,593.01 R11.2@35.43,712.6 27.56,720.47 27.56,1051.18 98.43,1122.05 v3@184.65,1122.05 ; S1.2@40.35,593.01 S1.2@172.24,593.01
  Bottom Layer w8: v3@185.53,1122.05 273.31,1122.05 308.74,1086.61 U3.94@368.11,1086.61
  other v3: 185.04,1122.05
DMXL_OUTPUT_EN: R14.2 U3.69 U5.8 | length 373.7
  Top Layer w8: v1(537.01,728.35) 537.01,733.46 567.32,763.78 U5.8@616.54,763.78 ; v1(562.99,488.19) R14.2@562.99,513.78
  Bottom Layer w8: v1(537.01,728.35) 547.24,718.11 U3.69@547.24,671.26 547.24,503.94 v1(562.99,488.19)
ETH_CT: C29.2 R24.2 R25.2 | length 107.4
  Top Layer w8: R25.2@976.38,553.15 976.38,566.93 v1(988.19,578.74) 998.03,588.58 R24.2@1019.68,588.58
  Bottom Layer w10: C29.2@988.19,537.4 v1(988.19,578.74)
ETH_MDC: U2.31 U3.16 | length 1322.1
  Top Layer w8: v1@728.35,1117.72 846.06,1000 846.06,975.98 839.6,969.52 839.6,467.88 963.39,344.09 v1(963.39,322.44)
  Bottom Layer w8: v1(724.41,1125.98) 714.97,1135.42 714.97,1204.75 722.85,1212.62 722.85,1264.19 U3.16@724.41,1265.75 ; v1(963.39,322.44) 963.39,312.2 984.25,291.34 984.25,145.67 1001.97,127.95 U2.31@1001.97,62.99 U2.31@1001.17,63.8
ETH_MDIO: R8.2 U2.30 U3.25 | length 1399.9
  Top Layer w8: v1(1027.17,128.74) 1027.17,186.61 R8.2@1037.4,196.85
  Routing_2 w8: v3@952.76,1252.36 956.69,1248.43 956.69,736.22 893.7,673.23 893.7,472.44 988.19,377.95 988.19,167.72 v1(1027.17,128.74)
  Bottom Layer w8: U3.25@901.57,1265.75 943.31,1265.75 v3(956.69,1252.36) ; U2.30@1021.65,62.99 v1@1021.65,123.23
ETH_RMII_CRS_DV: U2.40 U3.32 | length 1175.9
  Top Layer w8: v1(958.27,249.21) v1@959.22,250.17
  Routing_2 w8: v1(885.83,1086.61) 925.2,1047.24 925.2,736.22 834.65,645.67 834.65,488.19 921.26,401.57 921.26,271.65 943.7,249.21 v1(958.27,249.21)
  Bottom Layer w8: U2.40@850.39,175.2 898.43,175.2 958.27,235.04 v1(958.27,249.21) ; v1(885.83,1086.61) U3.32@962.6,1086.61
ETH_RMII_REF_CLK: U2.34 U3.24 U4.3 | length 1525.9
  Top Layer w8: v1(763.78,1041.73) 757.87,1035.83 757.87,718.5 681.1,641.73 681.1,562.99 641.73,523.62 U4.3@633.86,523.62 633.86,484.25 763.78,354.33 763.78,188.98 793.31,159.45 v1(946.46,159.45)
  Bottom Layer w8: v1(763.78,1041.73) 881.89,1159.86 U3.24@881.89,1265.75 ; v1@941.72,155.53 941.72,64.19 U2.34@942.91,62.99
ETH_RMII_RXD0: U2.43 U3.33 | length 1088.3
  Top Layer w8: v1(731.5,442.91) 786.61,498.03 v1@786.61,1013.78
  Bottom Layer w8: v1(731.5,442.91) 731.5,288.19 785.43,234.25 U2.43@850.39,234.25 ; v1(785.83,1014.17) 852.76,1014.17 905.51,1066.93 U3.33@962.6,1066.93
ETH_RMII_RXD1: U2.44 U3.34 | length 994.6
  Top Layer w8: v1(785.43,445.67) 816.54,476.77 816.54,973.23 ; 817.32,974.02 v1(817.32,985.43)
  Bottom Layer w8: v1(785.43,445.67) 759.84,420.08 759.84,289.76 795.67,253.94 U2.44@850.39,253.94 ; v1(817.32,985.43) 851.57,985.43 913.39,1047.24 U3.34@962.6,1047.24
ETH_RMII_TX_EN: U2.2 U3.48 | length 452.5
  Top Layer w8: v2@899.98,762.2 899.98,513.4 v1(920.08,493.31)
  Bottom Layer w8: v2@899.98,762.2 909.43,771.65 U3.48@962.6,771.65 ; v1(920.08,493.31) 920.06,388.99 U2.2@923.23,385.83
  other v2: 897.64,759.84
ETH_RMII_TXD0: U2.3 U3.51 | length 312.4
  Top Layer w8: v1(925.98,661.42) 946.08,641.32 v1(946.06,467.32)
  Bottom Layer w8: U3.51@901.57,671.26 911.42,661.42 v1(925.98,661.42) ; U2.3@942.91,385.83 v1@942.91,467.32
ETH_RMII_TXD1: U2.4 U3.52 | length 327
  Bottom Layer w8: U3.52@881.89,671.26 881.89,606.3 952.76,535.43 952.76,500 972.44,480.32 972.44,437.01 962.6,427.17 U2.4@962.6,385.83
ETH_RXM: pad.0@1259.84,696.85 T4.3 | length 84.3
  Top Layer w10: pad.0@1259.84,696.85 1275.59,681.1 T4.3@1275.59,619.09
ETH_RXP: pad.0@1208.66,661.42 T4.4 | length 57
  Top Layer w10: pad.0@1208.66,661.42 1244.09,625.98 T4.4@1244.09,619.09
ETH_TXM: pad.0@1153.54,964.57 T1.4 | length 125
  Top Layer w8: pad.0@1153.54,964.57 1170.28,947.83 T1.4@1170.28,846.46
ETH_TXP: pad.0@1125.98,897.64 T1.3 | length 113.1
  Top Layer w8: pad.0@1125.98,897.64 1137.8,885.83 1137.8,826.77 1149.61,814.96 T1.3@1170.28,814.96
FAN_EN: U1.3 U3.62 | length 1006.1
  Top Layer w8: U1.3@112.2,936.02 138.78,936.02 v3(181.1,893.7)
  Routing_1 w8: v3@183.27,893.7 181.1,891.54 181.1,728.35 208.66,700.79 279.53,700.79 311.02,732.28 421.26,732.28 492.13,803.15 v1(492.13,870.08)
  Bottom Layer w8: v1(492.13,870.08) 492.13,866.14 565.35,866.14 685.04,746.46 U3.62@685.04,671.26
FAN_V: J6.1 U1.1 | length 294.3
  Top Layer w10: U1.1@61.02,936.02 61.02,899.61 v8(66.93,893.7)
  Bottom Layer w20: v8(66.93,893.7) 66.93,842.52 98.43,811.02 198.82,811.02 J6.1@236.61,848.82